# EAGLE board BlinkyBoard (EAGLE 6.4)
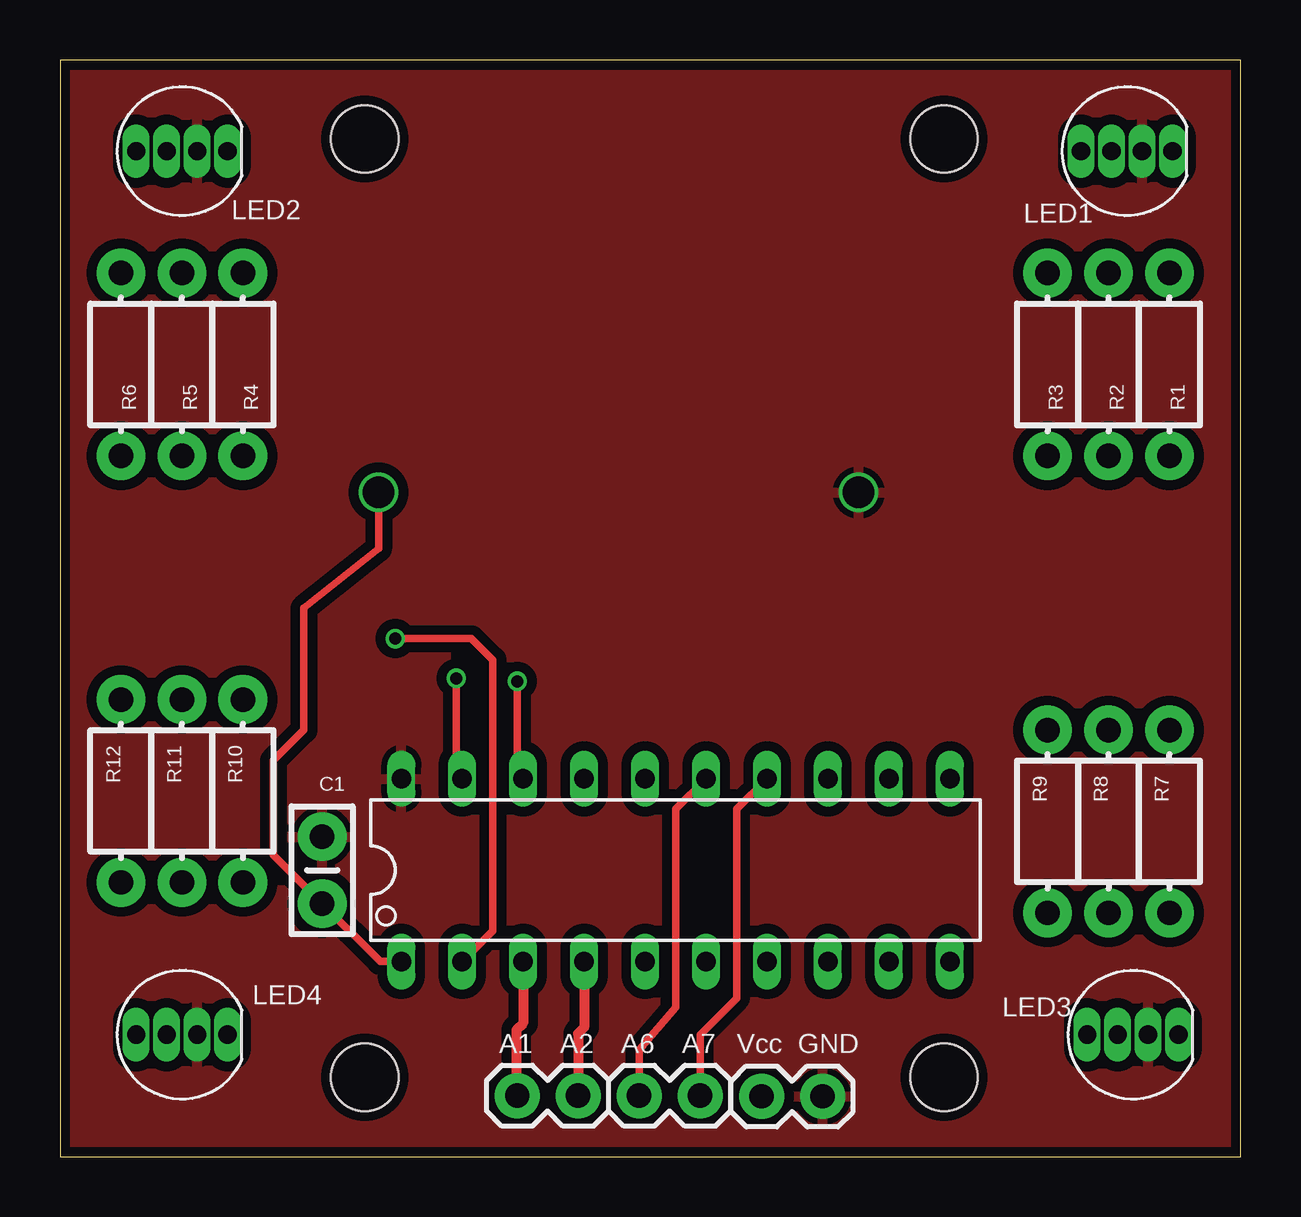
[diagram p0: board, top side]
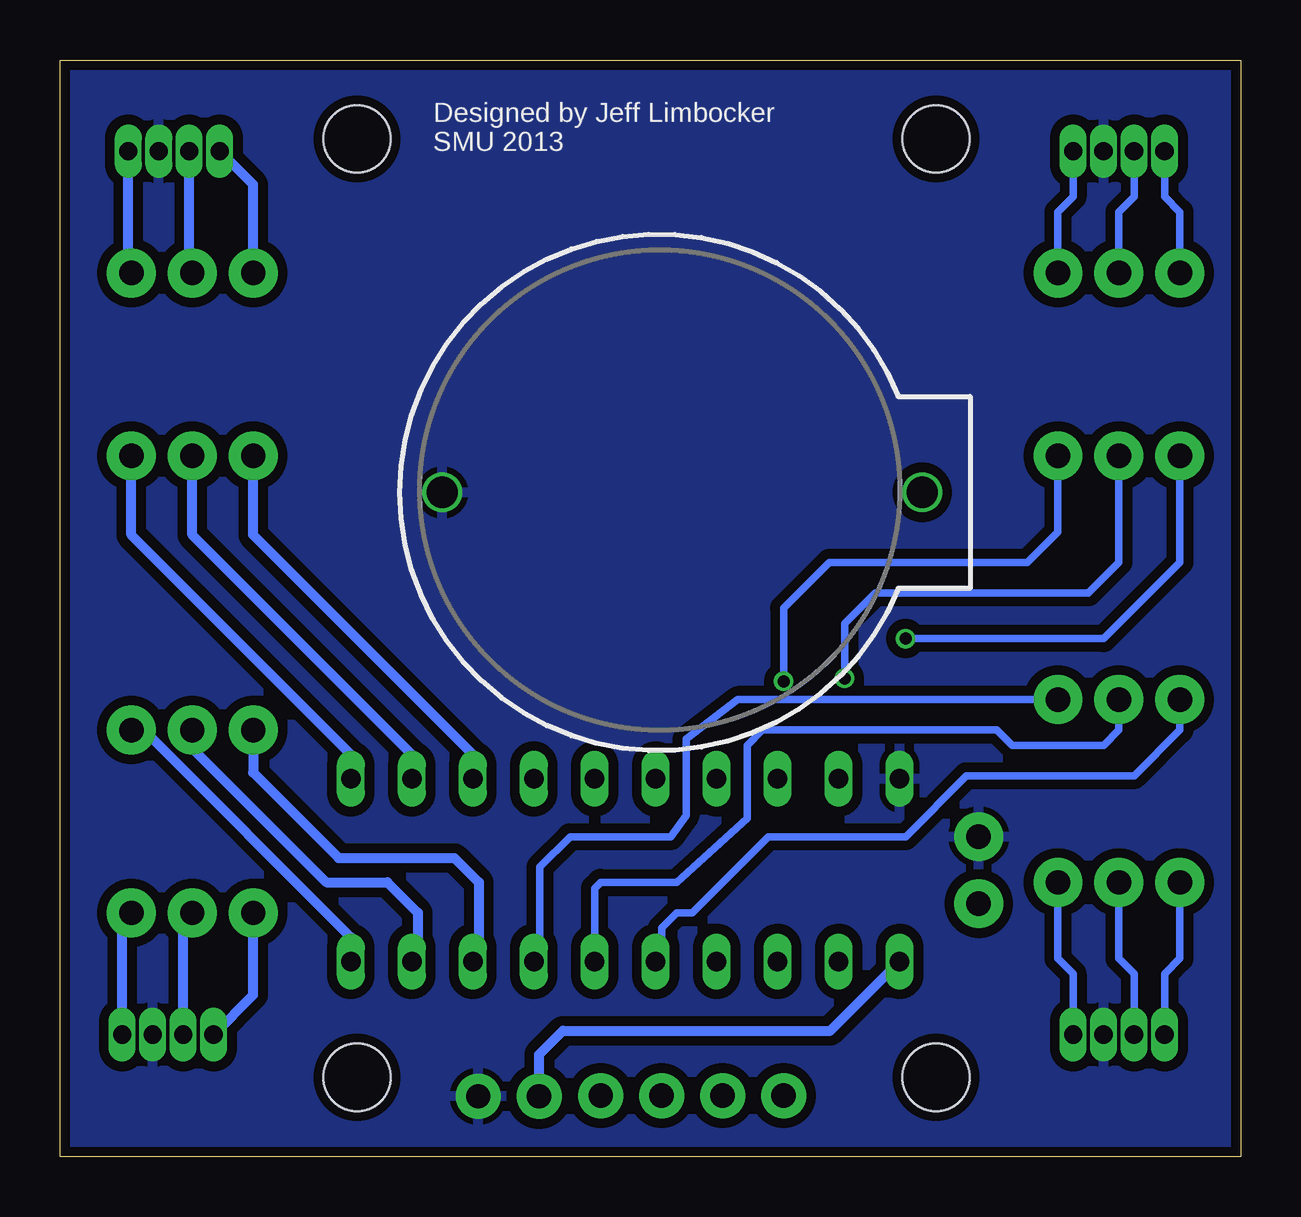
[diagram p1: board, bottom side, seen from below]

Size 49.2 x 45.71 mm. Coordinates in mm from the lower left corner, seen from the top.
Outline: 0,0 49.2,0 49.2,45.71 0,45.71 0,0
Copper layers (1*16): Top 0.035mm / dielectric 1.5mm / Bottom 0.035mm
Design rules "ITEADstudio_DRC *": minimum track width 6mil, minimum drill 12mil, track to track 6mil, track to pad 6mil, pad to pad 6mil, via to via 6mil, smd to smd 0mil, copper to edge 10mil, drill to drill 10mil, minimum pad ring 7mil, minimum via ring 6mil, stop-mask expansion 2mil, vias tented up to drill 100mil, thermal gap 10mil
Holes 2.8 mm at 12.7,3.3 36.83,3.3 12.7,42.42 36.83,42.42

## Footprints (pad centres in the part's own frame; a part is rotated, then mirrored left to right if it is on the bottom)
BATTCOM_20MM_PTH = drill 1.3: 1 20,0; 2 0,0
CAP-PTH-SMALL-KIT = drill 1.016 pad 2.032: 1 -1.397,0; 2 1.397,0
1X02 = drill 1.016 pad 1.88: 1 0,0; 2 2.54,0
LED-RGB-THRU = drill 0.762 pad 0.889 long: 1 1.905,0; 2 0.635,0; 3 -0.635,0; 4 -1.905,0
AXIAL-0.3-KIT = drill 1.016 pad 2.032: P$1 -3.81,0; P$2 3.81,0
N20 = drill 0.813 long: 1 -11.435,-3.81; 2 -8.895,-3.81; 3 -6.355,-3.81; 4 -3.815,-3.81; 5 -1.275,-3.81; 6 1.265,-3.81; 7 3.805,-3.81; 8 6.345,-3.81; 9 8.885,-3.81; 10 11.425,-3.81; 11 11.425,3.81; 12 8.885,3.81; 13 6.345,3.81; 14 3.805,3.81; 15 1.265,3.81; 16 -1.275,3.81; 17 -3.815,3.81; 18 -6.355,3.81; 19 -8.895,3.81; 20 -11.435,3.81

## Placement (x,y rotation side)
BAT1  [BATTCOM_20MM_PTH]  33.27,27.69 0 bottom
C1  [CAP-PTH-SMALL-KIT]  10.92,11.94 90 top
JP1  M02PTH  [1X02]  21.59,2.54 180 top
JP2  M02PTH  [1X02]  26.67,2.54 180 top
JP3  M02PTH  [1X02]  31.78,2.51 180 top
LED1  LED-RGB-CC-THRUDIFFUSE  [LED-RGB-THRU]  44.45,41.91 0 top
LED2  LED-RGB-CC-THRUDIFFUSE  [LED-RGB-THRU]  5.08,41.91 0 top
LED3  LED-RGB-CC-THRUDIFFUSE  [LED-RGB-THRU]  44.7,5.08 0 top
LED4  LED-RGB-CC-THRUDIFFUSE  [LED-RGB-THRU]  5.08,5.08 0 top
R1  [AXIAL-0.3-KIT]  46.23,33.02 90 top
R2  [AXIAL-0.3-KIT]  43.69,33.02 90 top
R3  [AXIAL-0.3-KIT]  41.15,33.02 90 top
R4  [AXIAL-0.3-KIT]  7.62,33.02 90 top
R5  [AXIAL-0.3-KIT]  5.08,33.02 90 top
R6  [AXIAL-0.3-KIT]  2.54,33.02 90 top
R7  [AXIAL-0.3-KIT]  46.23,13.97 270 top
R8  [AXIAL-0.3-KIT]  43.69,13.97 270 top
R9  [AXIAL-0.3-KIT]  41.15,13.97 270 top
R10  [AXIAL-0.3-KIT]  7.62,15.24 270 top
R11  [AXIAL-0.3-KIT]  5.08,15.24 270 top
R12  [AXIAL-0.3-KIT]  2.54,15.24 270 top
U$1  G2X[1/5]2---N20  [N20]  25.65,11.94 0 top

## Library data of the parts
BAT1 = SparkFun-Electromechanical
C1 = SparkFun-Capacitors
JP1-JP3 = SparkFun-Connectors
LED1-LED4 = SparkFun-LED; PROD_ID: DIO-09434
R1-R12 = SparkFun-Resistors
U$1 = TI_MSP430_v16

## Nets
A1: JP1.2 U$1.3
A2: JP1.1 U$1.4
GND: BAT1.2 C1.2 JP3.1 LED1.2 LED2.2 LED3.2 LED4.2 U$1.20
LED1_B: R3.P$1 U$1.13
LED1_G: R2.P$1 U$1.12
LED1_R: R1.P$1 U$1.11
LED2_B: R6.P$1 U$1.2
LED2_G: R5.P$1 U$1.19
LED2_R: R4.P$1 U$1.18
LED3_B: R9.P$1 U$1.8
LED3_G: R8.P$1 U$1.9
LED3_R: R7.P$1 U$1.10
LED4_B: R12.P$1 U$1.5
LED4_G: R11.P$1 U$1.6
LED4_R: R10.P$1 U$1.7
N$1: LED1.1 R1.P$2
N$2: LED1.3 R2.P$2
N$3: LED1.4 R3.P$2
N$4: LED2.1 R4.P$2
N$5: LED2.3 R5.P$2
N$6: LED2.4 R6.P$2
N$7: LED3.1 R7.P$2
N$8: LED3.3 R8.P$2
N$9: LED3.4 R9.P$2
N$10: LED4.1 R10.P$2
N$11: LED4.3 R11.P$2
N$12: LED4.4 R12.P$2
RST: U$1.16
SCL: JP2.1 U$1.14
SDA: JP2.2 U$1.15
VCC: BAT1.1 C1.1 JP3.2 U$1.1

## Tracks (layer width: path | path; a pad name or v marks a point on that pad's centre or on a via)
A1
  Top 0.406: U$1.3 19.3,5.56 19.02,5.28 19.02,2.57 JP1.2
A2
  Top 0.406: U$1.4 21.84,5.39 21.59,5.14 JP1.1
GND
  pour Bottom (isolate 0.406): 0,45.72 0,0 49.53,0 49.53,45.72
  pour Top (isolate 0.406): 0,45.72 0,0 49.53,0 49.53,45.72
  pour Bottom (isolate 0.406): 0,45.72 0,0 49.53,0 49.53,45.72
LED1_B
  Bottom 0.406: U$1.13 32,16.76 41.15,25.91 R3.P$1
LED1_G
  Bottom 0.406: U$1.12 34.54,16.76 43.69,25.91 R2.P$1
LED1_R
  Bottom 0.406: U$1.11 37.08,16.76 46.23,25.91 R1.P$1
LED2_B  (via drill 0.5)
  Top 0.305: v13.97,21.59 17.14,21.59 18.03,20.7 18.03,9.4 U$1.2
  Bottom 0.305: R6.P$1 2.54,24.77 5.71,21.59 v13.97,21.59
LED2_G  (via drill 0.5)
  Top 0.305: v16.51,19.94 16.51,16 U$1.19
  Bottom 0.305: R5.P$1 5.08,24.77 6.35,23.5 15.24,23.5 16.51,22.23 v16.51,19.94
LED2_R  (via drill 0.5)
  Top 0.305: v19.05,19.81 19.05,16 U$1.18
  Bottom 0.305: R4.P$1 7.62,26.04 8.89,24.77 17.14,24.77 19.05,22.86 v19.05,19.81
LED3_B
  Bottom 0.406: R9.P$1 41.15,16 37.59,12.45 32.77,12.45 31.75,11.43 31.75,8.38 U$1.8
LED3_G
  Bottom 0.406: R8.P$1 43.69,17.02 38.1,11.43 35.56,11.43 34.29,10.16 34.29,8.38 U$1.9
LED3_R
  Bottom 0.406: R7.P$1 45.72,17.78 37.08,9.14 U$1.10
LED4_B
  Bottom 0.305: R12.P$1 2.54,17.78 4.45,15.87 11.43,15.87 13.97,13.33 19.68,13.33 22.86,10.16 23.5,10.16 24.13,9.53 24.13,8.38 U$1.5
LED4_G
  Bottom 0.305: U$1.6 26.92,11.18 26.67,11.43 23.5,11.43 20.57,14.1 20.57,17.14 19.94,17.78 10.16,17.78 9.53,17.14 5.71,17.14 5.08,17.78 R11.P$1
LED4_R
  Bottom 0.305: R10.P$1 20.95,19.05 23.11,17.4 23.11,14.22 23.75,13.33 27.94,13.33 29.21,12.06 29.21,8.38 U$1.7
N$1
  Bottom 0.406: R1.P$2 46.35,36.96 LED1.1
N$2
  Bottom 0.406: R2.P$2 43.81,36.96 LED1.3
N$3
  Bottom 0.406: R3.P$2 41.15,40.51 LED1.4
N$4
  Bottom 0.305: LED2.1 6.99,40 7.62,39.37 R4.P$2
N$5
  Bottom 0.305: LED2.3 4.45,40 5.08,39.37 R5.P$2
N$6
  Bottom 0.305: LED2.4 3.17,40 2.54,39.37 R6.P$2
N$7
  Bottom 0.406: LED3.1 46.61,9.78 R7.P$2
N$8
  Bottom 0.406: LED3.3 44.07,9.78 R8.P$2
N$9
  Bottom 0.406: LED3.4 41.15,6.73 R9.P$2
N$10
  Bottom 0.305: R10.P$2 7.62,8.25 6.99,7.62 LED4.1
N$11
  Bottom 0.305: R11.P$2 5.08,8.25 4.45,7.62 LED4.3
N$12
  Bottom 0.305: R12.P$2 2.54,8.25 3.17,7.62 LED4.4
SCL
  Top 0.305: JP2.1 26.67,5.08 28.19,6.6 28.19,14.48 U$1.14
SDA
  Top 0.305: JP2.2 24.13,4.45 25.65,6.22 25.65,14.48 U$1.15
VCC
  Top 0.305: U$1.1 13.34,8.13 C1.1 8.89,12.57 8.89,16.51 10.16,17.78 10.16,22.86 13.27,25.34 BAT1.1
  Bottom 0.406: JP3.2 29.23,4.26 28.25,5.25 17.1,5.25 U$1.1

## Text on the board
tNames: LED2 | LED1 | C1 | LED4 | LED3 | A1 | A2 | A6 | A7 | Vcc | GND
bNames: Designed by Jeff Limbocker / SMU 2013